# Altium PCB BeagleBoneCape.PcbDoc
Units mil, origin at the board's own origin, x right, y up, seen from the top; angles counter-clockwise.
Board outline 3400 x 2150 mil, 4 copper layers (Top Layer, Signal Layer 1, Signal Layer 2, Bottom Layer), stack 62.2 mil thick; 51 components, 56 nets, 310 pads, 60 vias.
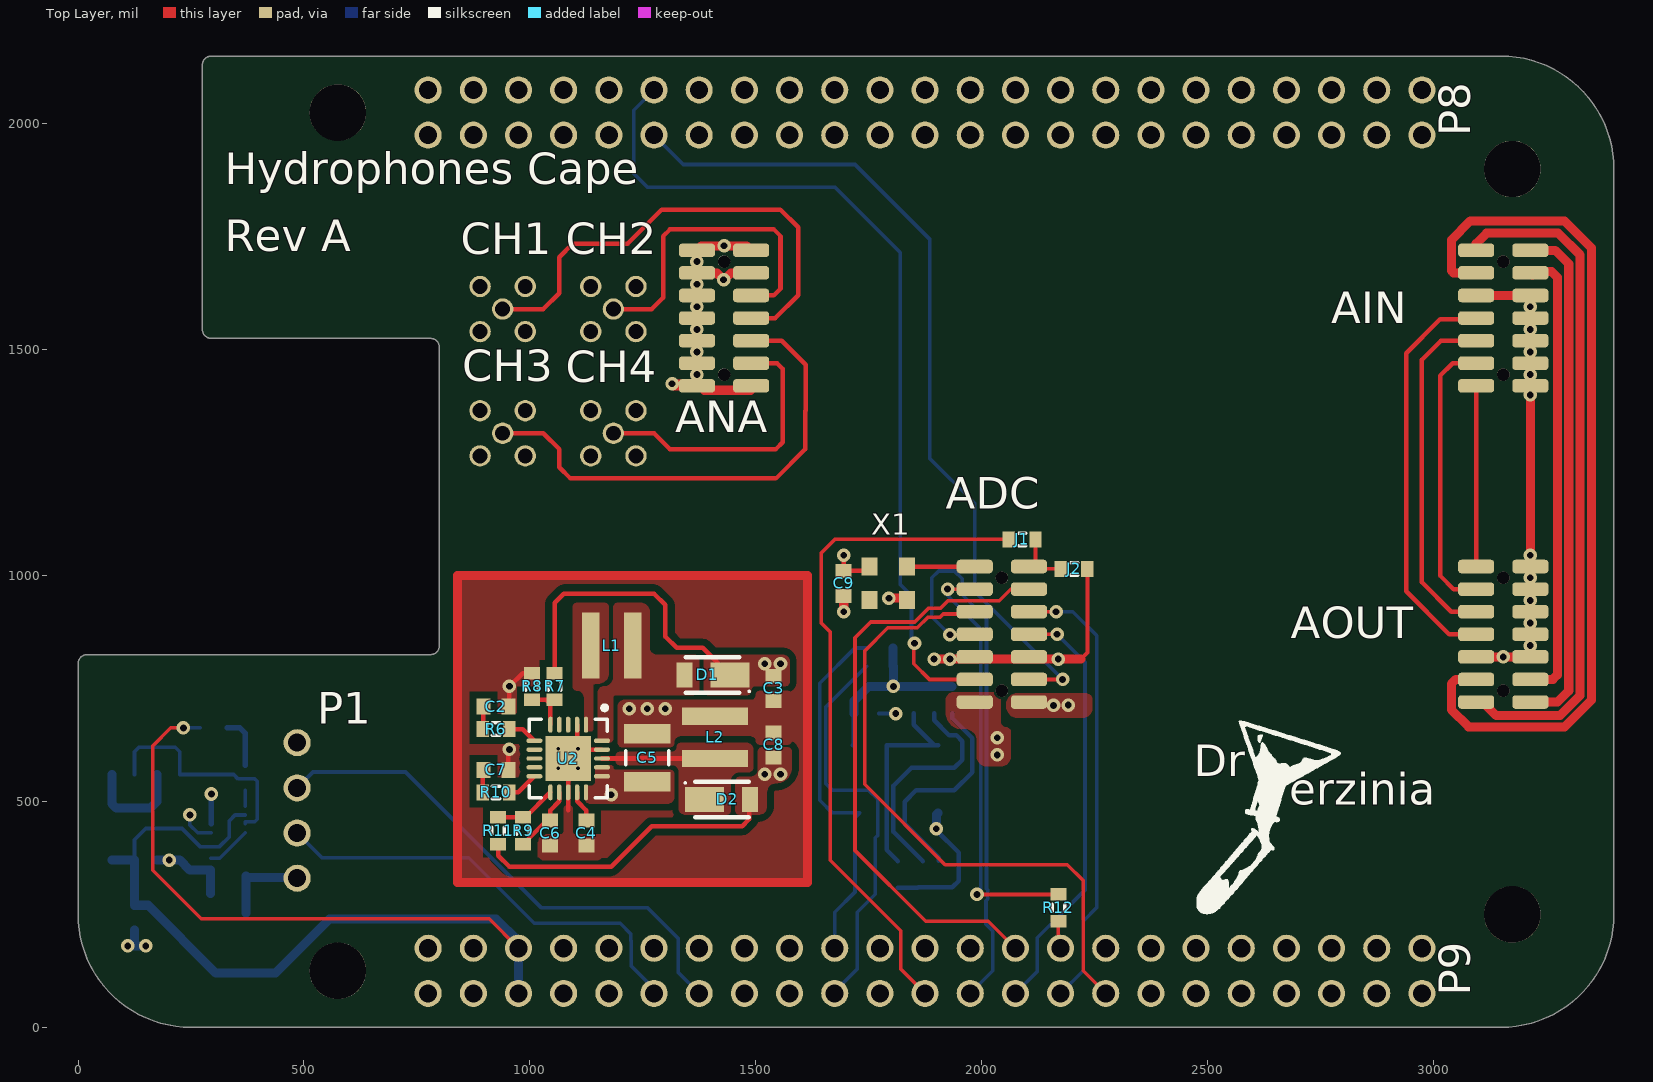
[diagram p0: Top Layer view]
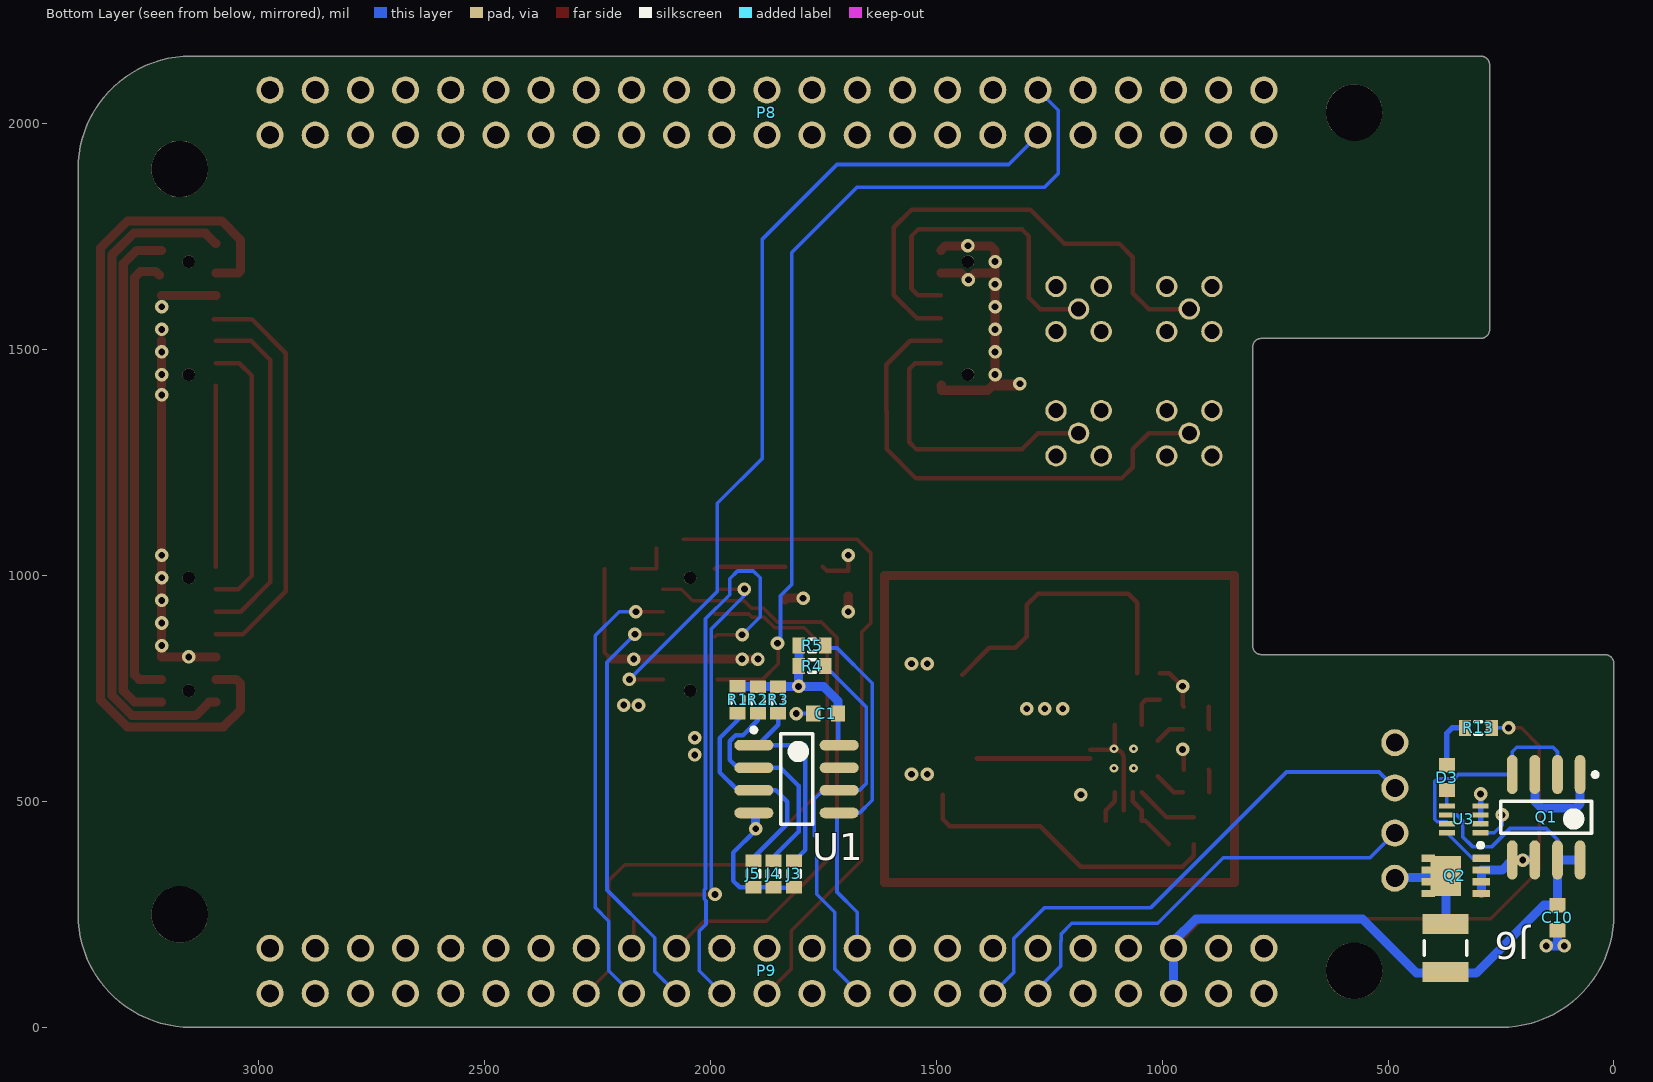
[diagram p1: Bottom Layer view, seen from below]
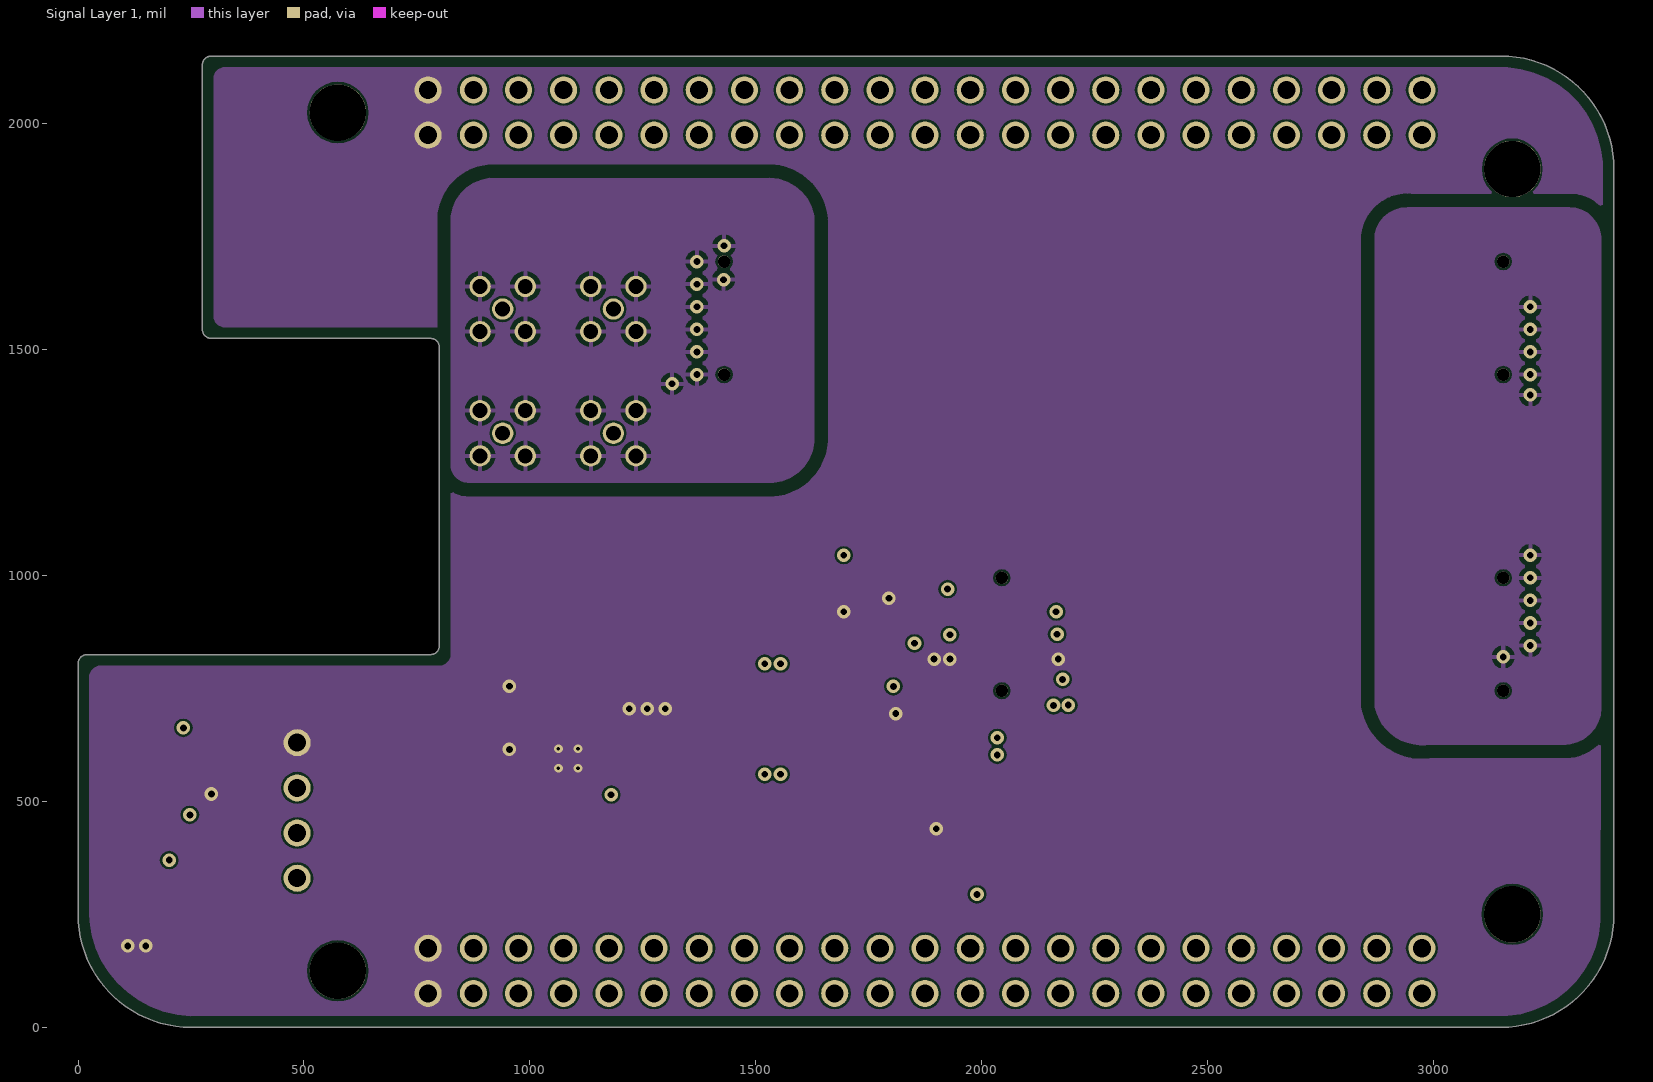
[diagram p2: Signal Layer 1]
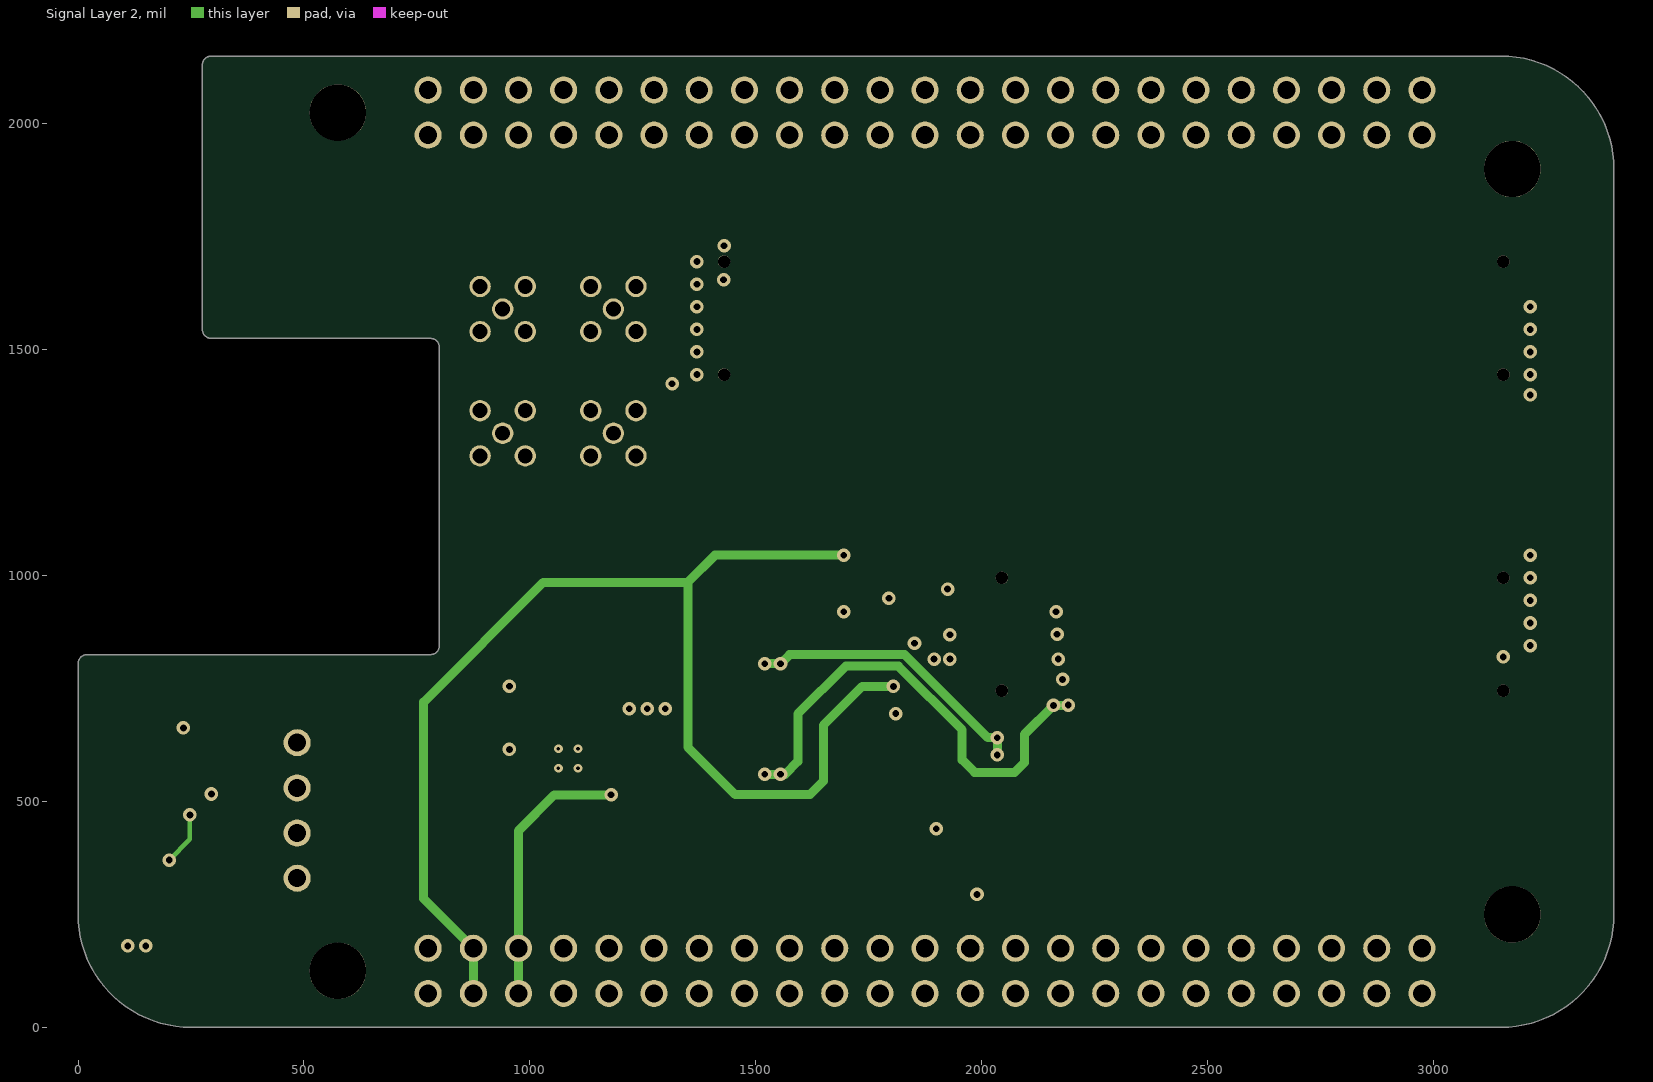
[diagram p3: Signal Layer 2]

## Layer stack, top to bottom
Top Solder: solder mask 0.4, Solder Resist, Dk 3.5
Top Layer: signal copper 1.4
Dielectric 1: core 7, FR-4, Dk 4.2
Signal Layer 1: signal copper 0.7
Dielectric 2: prepreg 44, Dk 4.2
Signal Layer 2: signal copper 0.7
Dielectric 3: core 7, Dk 4.2
Bottom Layer: signal copper 1.4
Bottom Solder: solder mask 0.4, Solder Resist, Dk 3.5

## Board outline
0,250 0,805 cw(c20,805) 20,825 780,825 ccw(c780,845) 800,845 800,1505 ccw(c780,1505) 780,1525 295,1525 cw(c295,1545) 275,1545 275,2130 cw(c295,2130) 295,2150 3150,2150 cw(c3150,1900) 3400,1900 3400,250 cw(c3150,250) 3150,0 250,0 cw(c250,250)

## Design rules (kind name [scope] priority, off if disabled: settings)
Clearance Clearance_4 [InNamedPolygon('GND_L01_P042')] p1: gap=15 ignorepadtopadclearanceinfootprint=FALSE except(0: Arc-Hole Track-Hole SMDPad-Hole THPad-Hole Via-Hole Fill-Hole Poly-Hole Region-Hole Text-Hole)
Clearance Clearance_2 [InNet('GND') vs InNet('GND2')] p2: gap=30 ignorepadtopadclearanceinfootprint=FALSE except(0: Arc-Hole Track-Hole SMDPad-Hole THPad-Hole Via-Hole Fill-Hole Poly-Hole Region-Hole Text-Hole)
Clearance Clearance_1 [InNet('AGND') vs InNet('GND')] p3: gap=30 ignorepadtopadclearanceinfootprint=FALSE except(0: Arc-Hole Track-Hole SMDPad-Hole THPad-Hole Via-Hole Fill-Hole Poly-Hole Region-Hole Text-Hole)
Clearance [All] p4: gap=5 ignorepadtopadclearanceinfootprint=FALSE except(0: Arc-Hole Track-Hole SMDPad-Hole THPad-Hole Via-Hole Fill-Hole Poly-Hole Region-Hole Text-Hole)
HoleSize [All] p1: absolutevalues=TRUE maxlimit=200 minlimit=1 maxpercent=80.000 minpercent=20.000
MinimumSolderMaskSliver [All] p1: minsoldermaskwidth=2
PolygonConnect PolygonConnect_4 [(InNet('GND') OR InNet('NetD2_2') OR InNet('VDD_+7V') OR InNet('VDD_-7V') OR InNet('NetD1_1') OR InNet('NetL1_1') OR InNet('VDD_5V_RAW'))] p1: connectstyle=Direct reliefconductorwidth=10 reliefentries=4 polygonreliefangle="90 Angle" airgapwidth=10
PolygonConnect [All] p2: connectstyle=Relief reliefconductorwidth=10 reliefentries=4 polygonreliefangle="90 Angle" airgapwidth=10
RoutingVias [All] p1: holewidth=15 width=30 viastyle="Through Hole" minholewidth=10 minwidth=18 maxholewidth=28 maxwidth=50
SilkToSilkClearance [All] p1: silktosilkclearance=5
SilkToSolderMaskClearance [IsPad] p1: minsilkscreentomaskgap=5 clearancetoexposedcopper=TRUE
SolderMaskExpansion [All] p1: expansion=4
Width [All] p1: maxlimit=20 minlimit=5 preferedwidth=10 toplayer_prefwidth=8 midlayer1_minwidth=10 midlayer2_minwidth=10 bottomlayer_prefwidth=8 minimp=50.000000 maximp=50.000000 favimp=50.000000
26 further rules are at their usual default settings.

## Components (designator, comment, footprint, x,y, rotation, side; value= is the part's Value field where it differs from the comment)
ADC "Header 7X2" FLE-107-01-G-DV-A-TR 2045,870 r90 top
AIN "Header 7X2" FLE-107-01-G-DV-A-TR 3155,1570 r90 top
ANA "Header 7X2" FLE-107-01-G-DV-A-TR 1430,1570 r90 top
AOUT "Header 7X2" FLE-107-01-G-DV-A-TR 3155,870 r90 top
C1 "Cap" 1608[0603] 1745,694.53 r180 bottom value=100pF
C2 "Cap" 1608[0603] 925,710 r0 top value=47nF
C3 "Cap" 1608[0603] 1540,750 r90 top value=10uF
C4 "Cap" 1608[0603] 1125,430 r270 top value=1uF
C5 "Cap" 14-1210 1260,596.85 r270 top value=10uF
C6 "Cap" 1608[0603] 1045,430 r90 top value=1uF
C7 "Cap" 1608[0603] 925,570 r0 top value=47nF
C8 "Cap" 1608[0603] 1540,625 r90 top value=10uF
C9 "Cap" 1608[0603] 1695,982.56 r90 top value=100pF
C10 "Cap" 1608[0603] 125,242.56 r90 bottom value=10uF
CH1 "COAX-M" MMCX-J-P-H-ST-TH1 940,1590 r0 top
CH2 "COAX-M" MMCX-J-P-H-ST-TH1 1185,1590 r0 top
CH3 "COAX-M" MMCX-J-P-H-ST-TH1 940,1315 r0 top
CH4 "COAX-M" MMCX-J-P-H-ST-TH1 1185,1315 r0 top
D1 "DFLS240" DFLS240 1380,780 r180 top
D2 "DFLS240" DFLS240 1450,504.53 r0 top
D3 "LED2" 1608[0603] 370,552.56 r270 bottom
J1 "Res3" J1-0603 2090,1080 r180 top value=0
J2 "Res3" J1-0603 2205,1015 r0 top value=0
J3 "Res3" J1-0603 1815,339.53 r90 bottom value=0
J4 "Res3" J1-0603 1860,339.53 r90 bottom value=0
J5 "Res3" J1-0603 1905,339.53 r90 bottom value=0
J6 "Res3" 14-1210 372.91,175.49 r270 bottom value=0
L1 "Inductor" SMD_41_41_21 1181.65,845 r0 top value=3.3uH
L2 "Inductor" SMD_41_41_31 1410,641.65 r270 top value=6.8uH
P1 "Header 4" 0705530038 485,330 r180 top
P8 "BBB_P8" BBB_CAPE_HEADER 775,1975 r180 bottom
P9 "BBB_P9" BBB_CAPE_HEADER 775,75 r180 bottom
Q1 "DMN6040SSD" SOIC-8 150,465 r270 bottom
Q2 "SI7113DN" POWERPAK1212-8 350,335 r0 bottom
R1 "Res3" J1-0603 1940,725 r90 bottom value=4.7K
R2 "Res3" J1-0603 1895,724.53 r90 bottom value=4.7K
R3 "Res3" J1-0603 1850,724.53 r90 bottom value=4.7K
R4 "Res3" J1-0603 1775,799.53 r0 bottom value=5.6K
R5 "Res3" J1-0603 1775,845 r0 bottom value=5.6K
R6 "Res3" J1-0603 925,660 r0 top value=5.6K
R7 "Res3" J1-0603 1055,754.53 r90 top value=2.15M
R8 "Res3" J1-0603 1005,754.53 r90 top value=113K
R9 "Res3" J1-0603 985,435 r270 top value=100K
R10 "Res3" J1-0603 925,520 r0 top value=12K
R11 "Res3" J1-0603 930,435 r270 top value=2.1M
R12 "Res3" J1-0603 2170,264.53 r90 top value=22
R13 "Res3" J1-0603 300.12,662.8 r180 bottom value=1K
U1 "CAT24C256" SOIC-8 1809.49,549.53 r180 bottom
U2 "ADP5070" QFN50P400X400X80_HS-21N 1085,595 r270 top
U3 "LTC4360CSC8-2#TRMPBF" LT-SC8-8-SC70_N 332.6,460.16 r0 bottom
X1 "DSC1001" DSC1001 1793.5,983 r0 top

## Footprints (in the part's own frame and the unit in brackets; to place one, negate y for a bottom-side part, rotate by r counter-clockwise, add the part's x,y. Pads: shape width x height; smd on the part's side, far side on the other; paste and mask are expansions set on the pad)
14-1210 [mm] "Chip Resistor, Body 3.2x2.5mm, IPC High Density"
  rect 1.1x2.6 smd: 1(-1.35,0) 2(1.35,0)
  silkscreen extent -0.4,-1.2 0.4,1.2, body extent -1.68,-1.32 1.68,1.32, height 0.9
1608[0603] [mm] "Chip Capacitor, Body 1.6x0.8mm, IPC High Density"
  rect 0.8x0.9 smd: 1(-0.7,0) 2(0.7,0)
  body extent -0.87,-0.48 0.87,0.48, height 1.3
0705530038 [mil] "Connector Header Through Hole, Right Angle 4 position 0.100\" (2.54mm)"
  round 60 hole 40: 1(0,0) 2(0,-100) 3(0,-200) 4(0,-300)
  body extent -28,-399 507,101, height 275
BBB_CAPE_HEADER [mil] "46-pin male header for BeagleBone Black P8,P9"
  round 60 hole 40: 1(0,0) 2(0,100) 3(-100,0) 4(-100,100) 5(-200,0) 6(-200,100) 7(-300,0) 8(-300,100) 9(-400,0) 10(-400,100) 11(-500,0) 12(-500,100) 13(-600,0) 14(-600,100) 15(-700,0) 16(-700,100) 17(-800,0) 18(-800,100) 19(-900,0) 20(-900,100) 21(-1000,0) 22(-1000,100) 23(-1100,0) 24(-1100,100) 25(-1200,0) 26(-1200,100) 27(-1300,0) 28(-1300,100) 29(-1400,0) 30(-1400,100) 31(-1500,0) 32(-1500,100) 33(-1600,0) 34(-1600,100) 35(-1700,0) 36(-1700,100) 37(-1800,0) 38(-1800,100) 39(-1900,0) 40(-1900,100) 41(-2000,0) 42(-2000,100) 43(-2100,0) 44(-2100,100) 45(-2200,0) 46(-2200,100)
  body extent -2246,-42 46,142, height 408
DFLS240 [mm]
  rect 0.9x1.4 smd: 1(0.95,0)
  rect 2.2x1.4 smd: 2(-1.6,0)
  silkscreen extent -2.74,-1 0.88,1, body extent -2.13,-0.96 0.86,0.96, height 0.98
DSC1001 [mil]
  rect 35x39 smd: 1(-41.5,-37) 2(41.5,-37) 3(41.5,37) 4(-41.5,37)
FLE-107-01-G-DV-A-TR [mil] "14 Position Receptacle Connector  Surface Mount"
  rrect50% 30x80 smd: 1(150,60) 2(150,-60) 3(100,60) 4(100,-60) 5(50,60) 6(50,-60) 7(0,60) 8(0,-60) 9(-50,60) 10(-50,-60) 11(-100,60) 12(-100,-60) 13(-150,60) 14(-150,-60)
  round 27.56 hole 27.56 unplated: ""(-125,0) ""(125,0)
  body extent -177,-90 177,90, height 178
J1-0603 [mm] "Chip Resistor, Body 1.6x0.8mm, IPC High Density"
  rect 0.7x0.9 smd: 1(-0.75,0) 2(0.75,0)
  silkscreen extent -0.2,-0.35 0.2,0.35, body extent -0.85,-0.48 0.85,0.48, height 0.9
LT-SC8-8-SC70_N [mm] "SOT23, 8-Leads, Body 2.2x1.35mm, Pitch 0.5mm, IPC Medium Density"
  rect 0.9x0.3 smd: 1(-0.95,0.75) 2(-0.95,0.25) 3(-0.95,-0.25) 4(-0.95,-0.75) 5(0.95,-0.75) 6(0.95,-0.25) 7(0.95,0.25) 8(0.95,0.75)
  silkscreen extent -1.07,1.33 -0.82,1.57, body extent -0.67,-1.1 0.67,1.1, height 1
MMCX-J-P-H-ST-TH1 [mm]
  round 1.2 hole 0.84: 1(0,0) 2(-1.27,-1.27) 3(1.27,-1.27) 4(1.27,1.27) 5(-1.27,1.27)
  body extent -1.75,-2.54 1.75,1.75, height 4.35
POWERPAK1212-8 [mil]
  rect 39x16 smd: 1(-56.5,39) 2(-56.5,13) 3(-56.5,-13) 4(-56.5,-39)
  rect 30x16 smd: 5(61,-39) 6(61,-13) 7(61,13) 8(61,39)
  rect 68x88 smd: 8(22,0)
  body extent -67,-67 67,67, height 44
QFN50P400X400X80_HS-21N [mm] "QFN, 20-Leads, Body 4.00x4.00mm, Pitch 0.50mm, Thermal Pad 2.55x2.55mm, IPC Medium Density"
  oval 0.9x0.25 smd: 1(-1.9,1) 2(-1.9,0.5) 3(-1.9,0) 4(-1.9,-0.5) 5(-1.9,-1) 11(1.9,-1) 12(1.9,-0.5) 13(1.9,0) 14(1.9,0.5) 15(1.9,1)
  oval 0.25x0.9 smd: 6(-1,-1.9) 7(-0.5,-1.9) 8(0,-1.9) 9(0.5,-1.9) 10(1,-1.9) 16(1,1.9) 17(0.5,1.9) 18(0,1.9) 19(-0.5,1.9) 20(-1,1.9)
  rect 2.55x2.55 smd: EP(0,0)
  silkscreen extent -2.97,-2.2 2.2,2.2, body extent -2.05,-2.05 2.05,2.05, height 0.8
SMD_41_41_21 [mm]
  rect 0.98x3.7 smd: 1(-1.185,0) 2(1.185,0)
  body extent -2.05,-2.05 2.05,2.05, height 2.1
SMD_41_41_31 [mm]
  rect 0.98x3.7 smd: 1(-1.185,0) 2(1.185,0)
  body extent -2.05,-2.05 2.05,2.05, height 3.1
SOIC-8 [mm] "SOIC, 8-Leads, Body 5.1x4.0mm (max), Pitch 1.27mm, IPC Medium Density"
  oval 2.2x0.6 smd: 1(-2.4,1.905) 2(-2.4,0.635) 3(-2.4,-0.635) 4(-2.4,-1.905) 5(2.4,-1.905) 6(2.4,-0.635) 7(2.4,0.635) 8(2.4,1.905)
  silkscreen extent -2.52,-2.55 0.9,2.88, body extent -2.03,-2.51 1.96,2.54, height 1.75

## Part data
ADC AIN ANA AOUT: "Header, 7-Pin, Dual row", LatestRevisionDate=17-Jul-2002, LatestRevisionNote="Re-released for DXP Platform.", Publisher="Altium Limited"
C1 C2 C3 C4 C5 C6 C7 C8 C9 C10: "Capacitor", LatestRevisionDate=17-Jul-2002, LatestRevisionNote="Re-released for DXP Platform.", PackageDescription="Radial Cap, Thru-Hole; 2 Leads; 0.3 in Pin Spacing", PackageReference=RAD-0.3, Published=8-Jun-2000, Publisher="Altium Limited"
CH1 CH2 CH3 CH4: "RF Coaxial PCB Connector, MMCX; Thru-Hole, Vertical Mount Plug,  50 Ohm Impedance", PackageDocument="Rev. A, 16-Jun-1997", ComponentLink1Description="Manufacturer Link", ComponentLink1URL=http://www.amphenolrf.com/, DatasheetDocument=30-May-2003, DrillSize="Corresponds to nominal value.", LatestRevisionDate=15-Jul-2004, LatestRevisionNote="Component Replaced.", PackageReference=908-21103, PCB_Layout="Complies with manufacturer's recommendation.", Published=15-Jul-2004, Publisher="Altium Limited"
D1 D2: library part Diode, "Default Diode", Code_JEDEC=DO-214-AB, LatestRevisionDate=17-Jul-2002, LatestRevisionNote="Re-released for DXP Platform.", PackageDescription="DO-214-AB/SMC; 2 C-Bend Leads; Body 7.9 x 5.9 mm, inc. leads (LxW)", PackageReference=SMC, PackageVersion=Sep-1996, Published=8-Jun-2000, Publisher="Altium Limited"
D3: "Typical RED, GREEN, YELLOW, AMBER GaAs LED", LatestRevisionDate=17-Jul-2002, LatestRevisionNote="Re-released for DXP Platform.", PackageDescription="SM LED; 2 Flat Leads", PackageReference=3.2X1.6X1.1, PackageVersion=Feb-2002, Published=8-Jun-2000, Publisher="Altium Limited"
J1 J2 J3 J4 J5 J6 R1 R2 R3 R4 R5 R6 R7 R8 R9 R10 R11 R12 R13: "Resistor", LatestRevisionDate=29-May-2009, LatestRevisionNote="IPC-7351 Footprint Added.", PackageDescription="Chip Resistor", PackageReference=J1-0603, Published=8-Jun-2000, Publisher="Altium Limited"
P1: "Header, 4-Pin", LatestRevisionDate=17-Jul-2002, LatestRevisionNote="Re-released for DXP Platform.", Publisher="Altium Limited"
U3: "Overvoltage Protection Controller, 2.5 to 80 V Vin, 8-pin SOT23 (SC8-8), 0 to 70 degC, Pb-Free, Mini Tape and Reel", Extended Temp="C, I", Manufacturer="Linear Technology", Power Good=yes, Supplier Part Number 1=LTC4360CSC8-2#TRMPBFTR-ND, Active Limiting=no, Circuit Breakers(#)=1, Code_JEDEC=MO-203, ComponentLink1Description="Manufacturer URL", ComponentLink1URL=http://www.linear.com/, ComponentLink2Description=Datasheet, ComponentLink2URL=http://cds.linear.com/docs/en/datasheet/436012fa.pdf, ComponentLink3Description="Package Specification", ComponentLink3URL=http://cds.linear.com/docs/en/packaging/SOT_8_05-08-1639.pdf, DatasheetVersion="Rev. A", Fast Comparator=no, Fault=no, Foldback=no, Mounting Technology="Surface Mount", PackageDescription="8-Pin Plastic SC70, Body 2 x 1.25 mm, Pitch 0.5 mm", PackageReference=SC8-8, PackageVersion="Rev. Ø, 06/2012", Packing="Mini Tape and Reel", PartNumber=LTC4360CSC8-2#TRMPBF, Reset=no, RoHS=TRUE, Supplier 1=Digi-Key, Supplier 2=Digi-Key, Supplier 3=Digi-Key, Supplier 4=Farnell, Supplier Part Number 2=LTC4360CSC8-2#TRMPBFCT-ND, Supplier Part Number 3=LTC4360CSC8-2#TRMPBFDKR-ND, Supplier Part Number 4=1839108, Vin Range="2.5 to 80 V"
L1 L2: Code_IEC=1005, Code_JEITA=0402, LatestRevisionDate=29-May-2009, LatestRevisionNote="IPC-7351 Footprint Added.", PackageDescription="Chip Inductor", PackageReference=0402-A, Published=8-Jun-2000, Publisher="Altium Limited"

## Free pads (board coordinates)
  round 125 hole 125 unplated: NPTH(575,125) NPTH(575,2025) NPTH(3175,250) NPTH(3175,1900)

## Via types
v1: diameter 30, hole 15, Top Layer to Bottom Layer, 56 vias
v2: diameter 19.68, hole 7.87, Top Layer to Bottom Layer, 4 vias

## Nets (pads, with @x,y where several pads share a name; then routed paths per layer and width w, separated by ;. In a path a pad name is that pad's centre, name@x,y a point inside that pad or via, vN(x,y) a via of type N, cw(c..) or ccw(c..) an arc to the next point about the centre after c; other vN are vias at no path point)
3.3V: AIN.3 AOUT.11 | length 1944.5
  Top Layer w20: AOUT.11 3050,770 3040,760 3040,703.18 3078.18,665 3290.71,665 3350,724.29 3350,1725.5 3290.5,1785 3082.26,1785 3040,1742.74 3040,1675 3045,1670 AIN.3
5V: AIN.1 AOUT.13 | length 1495.5
  Top Layer w20: AOUT.13 3110,720 3140,690 3280.36,690 3325,734.64 3325,1709.62 3276.6,1758.03 3118.03,1758.03 3095,1735
-3.3V: AIN.4 AOUT.12 | length 1008.1
  Top Layer w20: AOUT.12 3265,770 3275,780 3275,1660 3261.74,1673.26 3228.26,1673.26 AIN.4@3220,1665
-5V: AIN.2 AOUT.14 | length 1137.8
  Top Layer w20: AOUT.14 3275,720 3300,745 3300,1690 3270,1720 AIN.2
AGND: ANA.1 ANA.2 ANA.3 ANA.4 ANA.5 ANA.7 ANA.9 ANA.11 ANA.13 ANA.14 CH1.2 CH1.3 CH1.4 CH1.5 CH2.2 CH2.3 CH2.4 CH2.5 CH3.2 CH3.3 CH3.4 CH3.5 CH4.2 CH4.3 CH4.4 CH4.5 | length 812.4
  Top Layer w20: ANA.14 1488.55,1421.45 1488.55,1410.25 1386.6,1410.25 ANA.13@1370,1426.84 ; ANA.4 1445.7,1670 1430.7,1655 v1(1429,1655) 1418.08,1665.92 1418.08,1666.22 1414.3,1670 ANA.3 ; ANA.2 1480,1730 v1(1430,1730) 1380,1730 ANA.1 v1(1370,1695) ANA.3 ; ANA.13@1370,1426.84 1367.61,1424.45 v1(1315,1424.45) 1319.45,1420 ANA.13 ANA.13@1370,1426.84 ; ANA.13@1370,1426.84 v1(1370,1445) ANA.11 v1(1370,1495) ANA.9 v1(1370,1545) ANA.7 v1(1370,1595) ANA.5 v1(1370,1645) ANA.3
GND: ADC.9 ADC.10 C1.1 C2.2 C3.1 C4.2 C5.1 C6.1 C7.2 C8.2 C9.1 C10.1 J2.2 J3.1 J4.1 J5.1 L2.1 P1.4 P8.1 P8.2 P9.1 P9.2 R8.2 U1.4 U2.2 U2.13 U2.19 U2.EP U3.2 U3.3 U3.4 X1.2 | length 4417.2
  Top Layer w8: 2220,815 2234.53,829.53 J2.2
  Top Layer w10: C7.2 952.56,612.56 v1(955,615) ; C2.2 955,712.44 v1(955,755) 984.06,784.06 R8.2 ; 1085,480 U2.13 U2.EP cw(c1104.68,595) 1104.68,614.68 U2.19 ; U2.EP@1104.68,616.65 U2.2
  Top Layer w20: v1(1695,920) C9.1 ; v1(1795,950) 1831,950 X1.2 ; v1(1895,815) v1(1930,815) 2050,815 v1(2170,815) 2220,815 ; 840,320 1615,320 1615,1000 840,1000 840,320
  Bottom Layer w8: C1.1 v1(1810,694.53)
  Bottom Layer w10: J3.1@1815,308.46 1858.46,308.46 J4.1 J5.1 1935.47,310 1950,324.53 1950,386.08 1900,436.08 v1(1900,439.29)
  Bottom Layer w12: U3.2 U3.3 U3.4 v1@295.2,513.11
  Bottom Layer w20: v1(110,180) 130,180 ; C10.1 125,185 130,180 ; v1(150,180) 130,180 ; v1(1900,439.29) 1900,470.55 U1.4
  other v1: 295.2,516.42 1220,705 1260,705 1300,705
  other v2: 1063.35,573.35 1106.65,573.35 1063.35,616.65 1106.65,616.65
GND2: AIN.5 AIN.6 AIN.8 AIN.10 AIN.12 AIN.14 AOUT.2 AOUT.4 AOUT.6 AOUT.8 AOUT.9 AOUT.10 | length 910
  Top Layer w20: AOUT.9 v1(3155,820) AOUT.10 v1(3215,845) AOUT.8 v1(3215,895) AOUT.6 v1(3215,945) AOUT.4 v1(3215,995) AOUT.2 v1(3215,1045) v1@3215,1390 ; AIN.5 AIN.6 ; AIN.14 v1(3215,1445) AIN.12 v1(3215,1495) AIN.10
  other v1: 3215,1400 3215,1545 3215,1595
NetADC_1: ADC.1 X1.3 | length 157.1
  Top Layer w10: X1.3 ADC.1 ADC.1@1990,1015
NetADC_2: ADC.2 J1.1 J2.1 | length 100.7
  Top Layer w8: 2119.53,1060 2119.53,1015.47 2120,1015 J2.1
NetADC_3: ADC.3 R12.2 | length 949.4
  Top Layer w8: v1(1925,970) ADC.3 ; v1(1990,294.06) R12.2
  Bottom Layer w8: v1(1925,970) 1925,955 1997.94,882.06 1997.94,302 v1(1990,294.06)
NetADC_4: ADC.4 P9.28 | length 1345.1
  Top Layer w8: P9.28 2015,235 1876.3,235 1720,391.3 1720,862.06 1755.1,897.15 1852.15,897.15 1883,928 1909.77,928 1925.77,944 2039,944 2065,970 ADC.4
NetADC_5: ADC.5 P9.31 | length 1420.1
  Top Layer w8: ADC.5@1990,915 1915,915 1908,908 1881.38,908 1857.54,884.15 1792.5,884.15 1741.54,833.19 1741.54,537.76 1919.29,360 2190,360 2225,325 2225,125 P9.31
NetADC_6: ADC.6 P9.29 | length 997.2
  Top Layer w8: ADC.6 v1(2165,920)
  Bottom Layer w8: v1(2165,920) 2202.15,920 2255,867.15 2255,265 2225,235 2225,125 P9.29
NetADC_7: ADC.7 P9.25 | length 1254.8
  Top Layer w8: v1(1930,868.9) 1986.1,868.9 ADC.7@1990,865
  Bottom Layer w8: v1(1930,868.9) 1890,908.9 1890,995 1905,1010 1940,1010 1957.28,992.72 1957.28,957.72 2010.94,904.06 2010.94,651 2011,650.94 2011,613 2010.94,612.94 2010.94,307.05 2014,304 2014,284.11 2010,280.11 2010,228 2025,213 2025,125 P9.25
NetADC_8: ADC.8 P9.27 | length 946.6
  Top Layer w8: ADC.8 v1(2167.2,870)
  Bottom Layer w8: P9.27 2123.46,123.46 2123.46,198.46 2229,304 2229,808.2 v1(2167.2,870)
NetADC_11: ADC.11 P8.12 | length 1938.8
  Top Layer w8: v1@1850,850 1850,804.92 1884.92,770 ADC.11
  Bottom Layer w8: P8.12 1230,2030 1230,1890 1260,1860 1675,1860 1820,1715 1820,980 1845,955 1845,856.64 v1(1851.64,850)
NetADC_12: ADC.12 P8.11 | length 1876.8
  Top Layer w8: ADC.12 v1(2179.53,770)
  Bottom Layer w8: P8.11 1340,1910 1720,1910 1885,1745 1885,1260 1985,1160 1985,964.53 v1(2179.53,770)
NetAIN_7: AIN.7 AOUT.7 | length 912.6
  Top Layer w10: AOUT.7 3035,870 2940,965 2940,1492.16 3015,1567.16 3095,1567.16 AIN.7@3100,1567.16
NetAIN_9: AIN.9 AOUT.5 | length 777.2
  Top Layer w10: AOUT.5 3040,920 2975,985 2975,1477.84 3017.16,1520 AIN.9
NetAIN_11: AIN.11 AOUT.3 | length 626.1
  Top Layer w10: AOUT.3 3045,970 3015,1000 3015,1442.16 3042.84,1470 AIN.11
NetAIN_13: AIN.13 AOUT.1 | length 400
  Top Layer w10: AOUT.1 AIN.13
NetANA_6: ANA.6 CH2.1 | length 716.4
  Top Layer w10: CH2.1 1270,1590 1295,1615 1295,1750.85 1310.3,1766.16 1540.5,1766.16 1555,1751.65 1555,1635 1540,1620 ANA.6
NetANA_8: ANA.8 CH1.1 | length 1083.7
  Top Layer w10: CH1.1 1030,1590 1065,1625 1065,1705 1095,1735 1216.59,1735 1291.59,1810 1554.86,1810 1594.18,1770.68 1594.18,1620.63 1543.55,1570 ANA.8
NetANA_10: ANA.10 CH3.1 | length 1092.6
  Top Layer w10: CH3.1 1030,1315 1065,1280 1065,1240 1090,1215 1545,1215 1610,1280 1610,1365 1610.56,1364.44 1610.56,1466.94 1557.5,1520 ANA.10
NetANA_12: ANA.12 CH4.1 | length 633.3
  Top Layer w10: CH4.1 1275,1315 1310,1280 1545,1280 1560,1295 1560,1457.35 1547.35,1470 ANA.12
NetC2_1: C2.1 R6.1 | length 50.8
  Top Layer w10: R6.1 897.44,661.97 C2.1
NetC4_1: C4.1 U2.14 | length 71.1
  Top Layer w10: U2.14 1104.68,500.32 1125,480 C4.1
NetC6_2: C6.2 R9.2 U2.12 | length 152.6
  Top Layer w10: R9.2 1037.09,457.56 C6.2 1045,480 1065.31,500.31 U2.12
NetC7_1: C7.1 R10.1 | length 50.8
  Top Layer w10: R10.1 895.47,568.03 C7.1
NetD1_1: D1.1 L1.2 U2.20
NetD2_2: D2.2 L2.2 U2.18 | length 250.2
  Top Layer w10: U2.18 L2.2
NetD3_1: D3.1 R13.1 | length 116.2
  Bottom Layer w12: R13.1 358.35,662.8 370,651.14 D3.1
NetD3_2: D3.2 U3.5 | length 35.3
  Bottom Layer w8: U3.5 D3.2
NetJ1_2: J1.2 P9.23 | length 1498.2
  Top Layer w8: P9.23 1821,129 1821,214 1665,370 1665,875 1645,895 1645,1050 1675,1080 J1.2
NetJ3_2: J3.2 R3.1 U1.1 | length 470.5
  Bottom Layer w10: J3.2@1815,367.52 1790,392.52 1790,624.53 U1.1@1895,624.53 ; R3.1 1850,669.53 U1.1@1895,624.53 ; U1.1 U1.1@1895,624.53
NetJ4_2: J4.2 R2.1 U1.2 | length 508
  Bottom Layer w10: J4.2@1870,367.99 1805,432.99 1805,534.53 1845,574.53 U1.2 1940,574.53 1957.28,591.81 1957.28,633.56 1944.51,646.34 1928.19,646.34 1895,679.53 R2.1
NetJ5_2: J5.2 R1.1 U1.3 | length 487.6
  Bottom Layer w10: J5.2 1905,375.55 1830,450.55 1830,499.53 1855,524.53 U1.3 1940,524.53 1980,564.53 1980,639.53 1935,684.53 R1.1@1935,695
NetL1_1: L1.1 U2.1
NetP1_2: P1.2 P9.11 | length 998.9
  Bottom Layer w8: P1.2 540,375 865,375 1010,230 1200,230 1223.85,206.15 1223.85,191.15 1225,190 1225,135 1275,85 P9.11 P9.11@1260,75
NetP1_3: P1.3 P9.13 | length 1151.4
  Bottom Layer w8: P1.3 520,565 725,565 1025,265 1260,265 1329,196 1329,121 P9.13
NetP9_19: P9.19 R4.1 U1.6 | length 895.9
  Bottom Layer w8: P9.19 1675,79 1725,129 1725,254.53 1765,294.53 1765,419.53 1770,424.53 1770,504.53 1750,524.53 U1.6 1670,524.53 1655,539.53 1655,709.05 R4.1
NetP9_20: P9.20 R5.1 U1.5 | length 816.7
  Bottom Layer w8: P9.20 1675,254.53 1720,299.53 1720,464.53 1730,474.53 U1.5 1670,474.53 1642,502.53 1642,761.53 1720,839.53 R5.1@1745.47,839.53
NetP9_30: P9.30 R12.1 | length 62.1
  Top Layer w8: R12.1 2170,180 P9.30
NetQ1_1: Q1.1 Q1.3 | length 234.3
  Bottom Layer w20: Q1.1 75,495 85,485 160,485 175,500 Q1.3
NetQ1_2: Q1.2 Q1.4 U3.7 | length 505
  Bottom Layer w8: Q1.2 125,610 135,620 215,620 225,610 Q1.4 344.44,559.49 354.18,549.75 391.44,549.75 396.72,544.48 396.72,460.37 391.44,455.09 370,455.09 U3.7
NetQ1_5: Q1.5 Q1.6 Q2.1 Q2.2 Q2.3 U3.1 | length 375.8
  Signal Layer 2 w10: v1(201.64,370) 247.51,415.88 v1(247.51,470)
  Bottom Layer w8: v1(247.51,470) 247.51,447.88 264.76,430.63 U3.1
  Bottom Layer w20: Q1.6 Q1.5 247.51,348 Q2.3 Q2.2 Q2.1
NetQ2_4: Q2.4 U3.8 | length 100
  Bottom Layer w8: Q2.4 313.37,374 U3.8
NetR6_2: R6.2 U2.6 | length 66.3
  Top Layer w10: R6.2 984.57,660 U2.6
NetR7_1: R7.1 R8.1 U2.5 | length 90.3
  Top Layer w10: R8.1 1036.26,725 1045.63,715.63 U2.5
NetR9_1: R9.1 R11.1 U2.11 | length 138.7
  Top Layer w10: R11.1 R9.1 989.96,464.53 U2.11
NetR10_2: R10.2 U2.10 | length 70.4
  Top Layer w10: R10.2 974.57,520 U2.10
P1_5V_IN: J6.1 P1.1 Q2.5 Q2.6 Q2.7 Q2.8 | length 192.7
  Bottom Layer w20: 372,253.15 Q2.8@372,335 ; Q2.8@375,332 483,332 P1.1
VDD_3.3V: C1.2 C9.2 P9.3 P9.4 R1.2 R2.2 R3.2 R4.2 R5.2 U1.8 X1.4 | length 3301.1
  Top Layer w10: v1(1695,1045) C9.2 1742.12,1010.12 X1.4
  Signal Layer 2 w20: P9.3 P9.4 765,285 765,720 1030,985 1350,985 ; v1(1695,1045) 1410,1045 1350,985 ; v1(1805,754.53) 1736.1,754.53 1650,668.43 1650,545 1620,515 1455,515 1350,620 1350,985
  Bottom Layer w10: U1.8 1717.44,626.97 C1.2
  Bottom Layer w20: C1.2 1717.44,721.97 1750,754.53 v1(1805,754.53) ; R5.2@1804.53,839.53 R4.2 1805,799.06 v1(1805,754.53) ; R1.2@1935,754.06 R2.2 R3.2 1805.47,754.06 v1(1805,754.53)
VDD_5V_RAW: C5.2 C10.2 J6.2 P9.5 P9.6 Q1.7 Q1.8 R13.2 U2.15 U2.16 U2.17 U3.6 | length 3491.2
  Top Layer w8: v1(233.09,662.8) 205.01,662.8 165,622.78 165,347.36 272.36,240 910,240 P9.6
  Signal Layer 2 w20: P9.5 P9.6 975,435 1054.29,514.29 1179.29,514.29 v1(1180,515)
  Bottom Layer w8: Q1.7 125,415 150,440 230,440 270,400 312.99,400 335,422.01 335,457.4 347.6,470 U3.6 ; v1(233.09,662.8) R13.2
  Bottom Layer w20: Q1.8 Q1.7 C10.2 154.88,270.12 305,120 436.77,120 556.77,240 925,240 975,190 P9.6 P9.5
VDD_+7V: ADC.13 C3.2 D1.2 R7.2 | length 1308.1
  Top Layer w10: R7.2 1055,940 1075,960 1275,960 1300,935 1300,865 1325,840 1382.99,840 D1.2
  Signal Layer 2 w20: v1(1520,805) v1(1555,805) 1575,825 1829.92,825 2013.92,641 v1(2035,641) 2035,605 2033,603 v1(2034.94,603)
VDD_-7V: ADC.14 C8.1 D2.1 R11.2 | length 1756.9
  Top Layer w10: R11.2 930,380 955,355 1180,355 1270,445 1470,445 1485.39,460.39 D2.1@1485.39,515
  Signal Layer 2 w20: v1(1520,560) v1(1555,560) 1565,560 1593.65,588.65 1593.65,693.65 1699.53,799.53 1816.05,799.53 1957.28,658.3 1957.28,591.81 1984.8,564.3 2073.3,564.3 2095,586 2095,648.11 v1(2159.39,712.5) 2191.47,712.5 v1(2192.2,713.23)
pads on no net: ADC. AIN. ANA. AOUT. P8.3 P8.4 P8.5 P8.6 P8.7 P8.8 P8.9 P8.10 P8.13 P8.14 P8.15 P8.16 P8.17 P8.18 P8.19 P8.20 P8.21 P8.22 P8.23 P8.24 P8.25 P8.26 P8.27 P8.28 P8.29 P8.30 P8.31 P8.32 P8.33 P8.34 P8.35 P8.36 P8.37 P8.38 P8.39 P8.40 P8.41 P8.42 P8.43 P8.44 P8.45 P8.46 P9.7 P9.8 P9.9 P9.10 P9.12 P9.14 P9.15 P9.16 P9.17 P9.18 P9.21 P9.22 P9.24 P9.26 P9.32 P9.33 P9.34 P9.35 P9.36 P9.37 P9.38 P9.39 P9.40 P9.41 P9.42 P9.43 P9.44 P9.45 P9.46 U1.7 U2.3 U2.4 U2.7 U2.8 U2.9 X1.1

## Polygon pours and split planes (outlines as drawn)
GND on Top Layer "GND_L01_P042" (solid, pour order 42): 840,320 1615,320 1615,990 840,1000 840,900 840,805 840,725
VDD_+7V on Top Layer "Top Layer-VDD_+7V" (solid, pour order 44): 2065,600 2065,654 ccw(c2055,654) 2055,664 cw(c2055,676.24) 2042.76,676.24 2042.76,723.75 ccw(c2025,723.75) 2025,741.5 1937.8,741.5 ccw(c1937.8,725) 1921.3,725 1921.3,695.59 ccw(c1957.12,695.59) 1957.13,659.76 1964.55,659.76 cw(c1964.55,634.32) 1990,634.31 1990,600 ccw(c2011.12,598.88) 2010,577.76 2042.76,577.76 ccw(c2042.8,599.96)
NetD2_2 on Top Layer "NETD2_2_L01_P010" (solid, pour order 10): 1190,600 cw(c1200,600) 1200,610 1315,610 ccw(c1315,620) 1325,620 cw(c1335,620) 1335,630 1480,630 cw(c1480,615) 1495,615 1495,575 cw(c1485,575) 1485,565 1465,565 ccw(c1465,545) 1445,545 1445,480 cw(c1435,480) 1435,470 1345,470 cw(c1345,485) 1330,485 1330,565 ccw(c1315,565) 1315,580 1200,580 cw(c1200,590) 1190,590
GND on Top Layer "GND_L01_P012" (solid, pour order 12): 1195,630 ccw(c1205,630) 1205,620 1310,620 ccw(c1310,630) 1320,630 cw(c1335,630) 1335,645 1490,645 cw(c1490,635) 1500,635 ccw(c1510,635) 1510,625 1570,625 ccw(c1570,635) 1580,635 1580,735 ccw(c1570,735) 1570,745 1510,745 ccw(c1510,735) 1500,735 cw(c1490,735) 1490,725 1210,725 ccw(c1210,710) 1195,710
NetD1_1 on Top Layer "NETD1_1_L01_P022" (solid, pour order 22): 1360,735 ccw(c1360,750) 1375,750 1375,815 ccw(c1365,815) 1365,825 1280,825 cw(c1280,840) 1265,840 1265,920 ccw(c1245,920) 1245,940 1195,940 ccw(c1195,930) 1185,930 1185,775 cw(c1165,775) 1165,755 ccw(c1165,740) 1150,740 1150,635 ccw(c1155,635) 1155,630 1175,630 ccw(c1175,640) 1185,640 1185,730 cw(c1190,730) 1190,735
NetL1_1 on Top Layer "NETL1_1_L01_P024" (solid, pour order 24): 1145,760 1150,760 ccw(c1150,785) 1175,785 1175,930 ccw(c1165,930) 1165,940 1105,940 ccw(c1105,930) 1095,930 1095,755 ccw(c1105,755) 1105,745 cw(c1105,730) 1120,730 1120,660 ccw(c1125,660) 1125,655 1135,655 ccw(c1135,660) 1140,660 1140,755 cw(c1145,755)
GND on Top Layer "GND_L01_P026" (solid, pour order 26): 1030,425 ccw(c1030,415) 1020,415 1020,380 ccw(c1030,380) 1030,370 1150,370 ccw(c1150,380) 1160,380 1160,420 ccw(c1155,420) 1155,425 1105,425 cw(c1105,435) 1095,435 1095,485 ccw(c1090,485) 1090,490 1080,490 ccw(c1080,485) 1075,485 1075,435 cw(c1065,435) 1065,425
VDD_+7V on Top Layer "VDD_+7V_L01_P018" (solid, pour order 18): 1385,745 ccw(c1395,745) 1395,735 1480,735 ccw(c1480,745) 1490,745 cw(c1500,745) 1500,755 1565,755 ccw(c1565,765) 1575,765 1575,810 ccw(c1560,810) 1560,825 1400,825 ccw(c1400,810) 1385,810
VDD_-7V on Top Layer "VDD_-7V_L01_P016" (solid, pour order 16): 1455,480 ccw(c1465,480) 1465,470 1505,470 ccw(c1505,490) 1525,490 1525,520 cw(c1545,520) 1545,540 ccw(c1545,575) 1580,575 1580,610 ccw(c1570,610) 1570,620 1515,620 ccw(c1515,610) 1505,610 1505,570 cw(c1490,570) 1490,555 1465,555 ccw(c1465,545) 1455,545
VDD_5V_RAW on Top Layer "VDD_5V_RAW_L01_P028" (solid, pour order 28): 1135,495 cw(c1135,510) 1120,510 1120,530 cw(c1125,530) 1125,535 1135,535 ccw(c1135,545) 1145,545 1145,575 cw(c1150,575) 1150,580 1180,580 cw(c1180,575) 1185,575 ccw(c1190,575) 1190,570 1310,570 cw(c1310,560) 1320,560 1320,510 cw(c1305,510) 1305,495
VDD_-7V on Top Layer "VDD_-7V_L01_P040" (solid, pour order 40): 2055,715 2055,710 ccw(c2080,710) 2080,685 2225,685 ccw(c2225,705) 2245,705 2245,725 ccw(c2230,725) 2230,740 2080,740 ccw(c2080,715)
GND on Signal Layer 1 "GND_L02_P032" (solid, pour order 32): 50,800 ccw(c50,775) 25,775 25,250 ccw(c257.5,257.5) 265,25 3150,25 ccw(c3147.5,247.5) 3370,250 3375,1900 ccw(c3150,1900) 3150,2125 325,2125 ccw(c325,2100) 300,2100 300,1575 ccw(c325,1575) 325,1550 800,1550 cw(c800,1525) 825,1525 825,825 cw(c800,825) 800,800
AGND on Signal Layer 1 "AGND_L02_P006" (solid, pour order 6): 825,1245 ccw(c865,1245) 865,1205 1530,1205 ccw(c1530,1305) 1630,1305 1630,1786.57 ccw(c1528.79,1778.79) 1521,1880 921,1880 ccw(c919.71,1785.29) 825,1786.57
GND2 on Signal Layer 1 "GND2_L02_P008" (solid, pour order 8): 3295,625.74 ccw(c3288.74,708.74) 3371.74,715 3371.74,1749.65 ccw(c3300.7,1743.96) 3295,1815 2950,1815 ccw(c2942.67,1742.33) 2870,1749.65 2870,715 ccw(c2974.6,730.34) 2989.93,625.74

## Silkscreen, mask and mechanical layers (free items; w line width, h text height)
Top Overlay:
  drawing of 735 lines, arcs and shapes, not listed
  text "Hydrophones Cape" at 325,1843.25 h120
  text "Rev A" at 325,1695 h120
  text "Dr" at 2470,533 h120
  text "erzinia" at 2681,469 h120
Mechanical 1:
  the board outline again, w10